# Altium PCB CSMS.PcbDoc
Units mm, origin at the board's own origin, x right, y up, seen from the top; angles counter-clockwise.
Board outline 20 x 87 mm, 2 copper layers (Top Layer, Bottom Layer); 12 components, 8 nets, 32 pads, 158 vias.
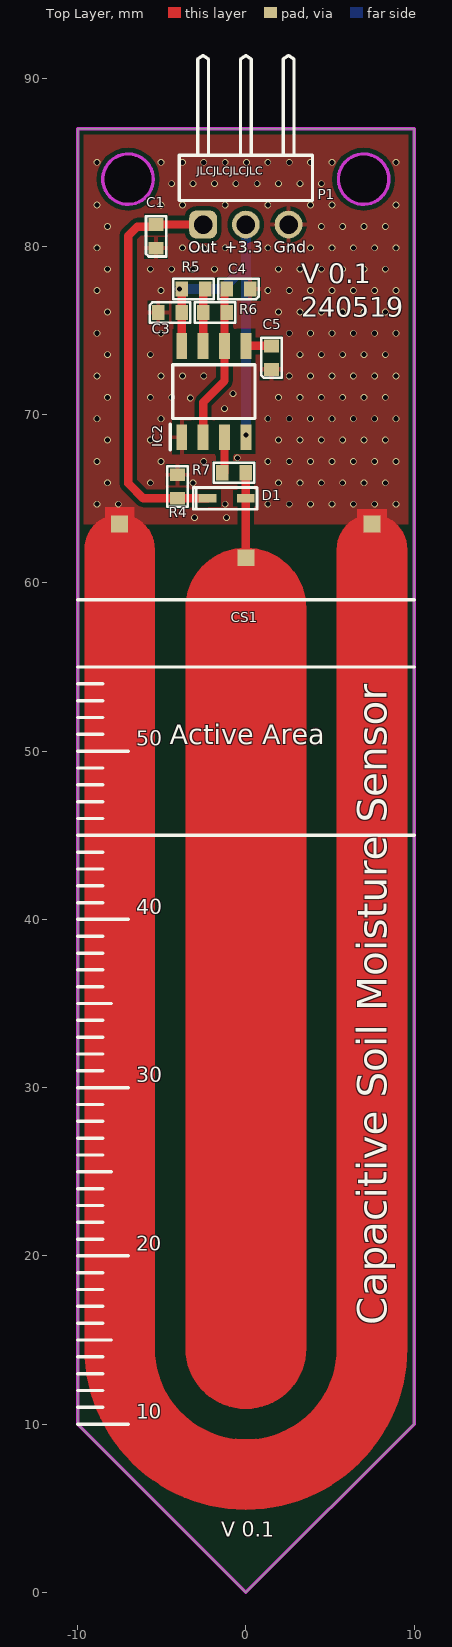
[diagram p0: Top Layer view]
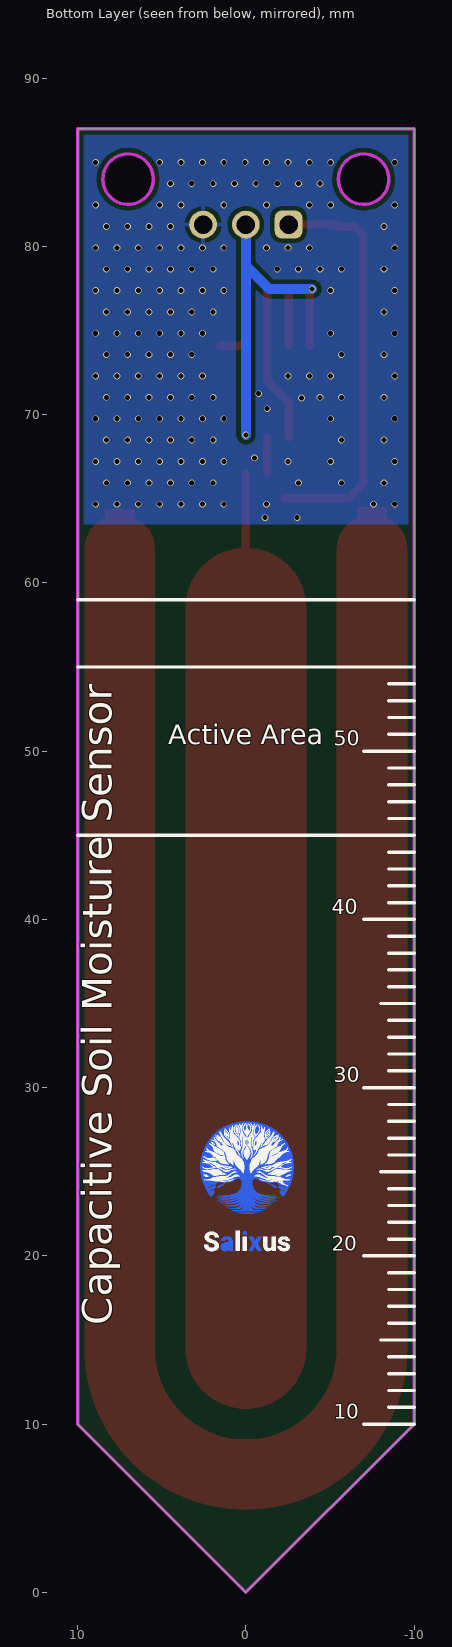
[diagram p1: Bottom Layer view, seen from below]
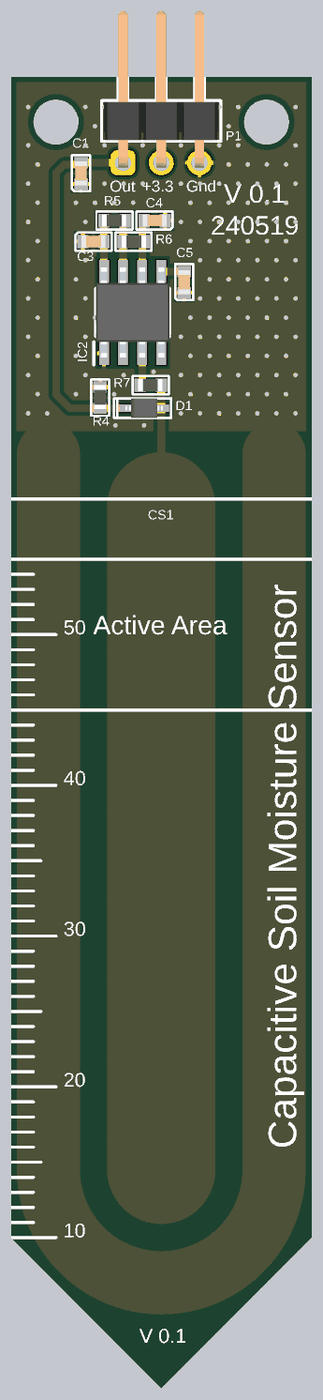
[diagram p2: 3D render of the assembled board from above, using the file's embedded part models]

## Layer stack, top to bottom
Top Solder: solder mask 0.0102, Solder Resist, Dk 3.5
Top Layer: signal copper 0.0356
Dielectric 1: dielectric 0.32, FR-4, Dk 4.8
Bottom Layer: signal copper 0.0356
Bottom Solder: solder mask 0.0102, Solder Resist, Dk 3.5

## Board outline
0,0 -10,10 -10,87 10,87 10,10
cut-out: 7,82.5 cw(c7,84) 5.5,84 cw(c7,84) 7,85.5 cw(c7,84) 8.5,84 cw(c7,84)
cut-out: -7,82.5 cw(c-7,84) -8.5,84 cw(c-7,84) -7,85.5 cw(c-7,84) -5.5,84 cw(c-7,84)

## Design rules (kind name [scope] priority, off if disabled: settings)
Clearance [All] p1: gap=0.254 ignorepadtopadclearanceinfootprint=FALSE except(0: Arc-Hole Track-Hole SMDPad-Hole THPad-Hole Via-Hole Fill-Hole Poly-Hole Region-Hole Text-Hole)
PolygonConnect [All] p1: thpad.connectstyle=Relief thpad.reliefconductorwidth=0.254 thpad.reliefentries=4 thpad.polygonreliefangle="90 Angle" thpad.airgapwidth=0.254 smdpad.connectstyle=Relief smdpad.reliefconductorwidth=0.254 smdpad.reliefentries=4 smdpad.polygonreliefangle="90 Angle" smdpad.airgapwidth=0.254 via.connectstyle=Direct via.reliefconductorwidth=0.254 via.reliefentries=4 via.polygonreliefangle="90 Angle" via.airgapwidth=0.254
RoutingVias [All] p1: holewidth=0.3 width=0.4 viastyle="Through Hole" minholewidth=0.3 minwidth=0.4 maxholewidth=0.711 maxwidth=1.27
SolderMaskExpansion [All] p1: expansion=0.102 istentingtop=FALSE
UnRoutedNet [All] p1: checkbadconnections=TRUE
Width [All] p1: maxlimit=1 minlimit=0.254 preferedwidth=0.3 minimp=50.000000 maximp=50.000000 favimp=50.000000
29 further rules are at their usual default settings.

## Components (designator, comment, footprint, x,y, rotation, side; value= is the part's Value field where it differs from the comment)
C1 "CL10B105KA8NNNC" "0603 CAP" -5.334,80.604 r90 top value="1uF 25VDC"
C3 "CL10B104KB8NNNC" "0603 CAP" -4.51,76.073 r0 top value="100nF 50VDC"
C4 "CL10B471KB8NNNC" "0603 CAP" -0.44,77.47 r180 top value="470pF 50VDC"
C5 "CC0603KRX7R9BB103" "0603 CAP" 1.524,73.386 r90 top value="10nF 50VDC"
CS1 "Sens" SENS 0,34.5 r0 top
D1 "1N4148WS-E3-08" SOD2513X110N -1.138,65.024 r0 top
IC2 "TLC555CDR" SOIC127P600X175-8N -1.905,71.374 r90 top
P1 "61300311021" 61300311021 0,84.074 r180 top
R4 "0603SAF1004T5E" "0603 RES" -4.064,65.724 r90 top value="1M %1"
R5 "0603SAF3300T5E" "0603 RES" -3.11,77.47 r180 top value="330R %1"
R6 "0603SAF1601T5E" "0603 RES" -1.84,76.073 r0 top value="1.6K %1"
R7 "0603SAF1002T5E" "0603 RES" -0.7,66.548 r180 top value="10K %1"

## Footprints (in the part's own frame and the unit in brackets; to place one, negate y for a bottom-side part, rotate by r counter-clockwise, add the part's x,y. Pads: shape width x height; smd on the part's side, far side on the other; paste and mask are expansions set on the pad)
"0603 CAP" [mm]
  rect 0.75x0.9 smd: 1(-0.7,0) 2(0.7,0)
  silkscreen extent -1.2,-0.6 1.2,0.6, body extent -0.8,-0.4 0.8,0.4, height 0.8
"0603 RES" [mm]
  rect 0.75x0.9 smd: 1(-0.7,0) 2(0.7,0)
  silkscreen extent -1.2,-0.6 1.2,0.6, body extent -0.77,-0.4 0.83,0.4, height 0.45
61300311021 [mm] "Pin Header, pitch 2.54 mm, THT, Angled, single row, 3p"
  rrect50% 1.65x1.65 hole 1.1: 1(2.54,2.77)
  round 1.65 hole 1.1: 2(0,2.77) 3(-2.54,2.77)
  silkscreen extent -3.96,-7.27 3.96,1.35, body extent -3.81,-7.27 3.81,3.09, height 2.58
SENS [mm]
  rect 1x1 smd paste-2539.97 mask+0.102: 1(0,27) 2(-7.5,29) 2(7.5,29)
  Top Layer region: -9.5,-20 -9.5,27.5 -9.302,28.368 -8.747,29.064 -7.945,29.45 -7.055,29.45 -6.253,29.064 -5.698,28.368 -5.5,27.5 -5.5,27.5 -5.5,-20 -4.955,-22.386 -3.429,-24.3 -1.224,-25.362 1.224,-25.362 3.429,-24.3 4.955,-22.386 5.5,-20 5.5,-20 5.5,27.5 5.698,28.368 6.253,29.064 7.055,29.45 7.945,29.45 8.747,29.064 9.302,28.368 9.5,27.5 9.5,27.5 9.5,-20 8.559,-24.122 5.923,-27.427 2.114,-29.262 -2.114,-29.262 -5.923,-27.427 -8.559,-24.122 -9.5,-20
  Top Layer region: -3.5,-20 -3.153,-21.519 -2.182,-22.736 -0.779,-23.412 0.779,-23.412 2.182,-22.736 3.153,-21.519 3.5,-20 3.5,-20 3.5,24 3.153,25.519 2.182,26.736 0.779,27.412 -0.779,27.412 -2.182,26.736 -3.153,25.519 -3.5,24 -3.5,24
  Top Layer lines w0.2: -9.5,-20 ccw(c0,-20) 9.5,-20 9.5,25.317 9.5,27.5 ccw(c7.5,27.5) 5.5,27.5 5.5,-20 cw(c0,-20) -5.5,-20 -5.5,27.5 ccw(c-7.5,27.5) -9.5,27.5 -9.5,-20 ; -3.5,-20 ccw(c0,-20) 3.5,-20 3.5,24 ccw(c0,24) 0,27.5 ccw(c0,24) -3.5,24 -3.5,-20
SOD2513X110N [mm]
  rect 1.05x0.5 smd: 1(-1.138,0) 2(1.138,0)
  silkscreen extent -2,-0.65 1.8,0.65, body extent -1.25,-0.65 1.25,0.65, height 1.1
SOIC127P600X175-8N [mm]
  rect 1.525x0.65 smd: 1(-2.712,1.905) 2(-2.712,0.635) 3(-2.712,-0.635) 4(-2.712,-1.905) 5(2.712,-1.905) 6(2.712,-0.635) 7(2.712,0.635) 8(2.712,1.905)
  silkscreen extent -3.47,-2.45 1.6,2.58, body extent -3,-2.45 3,2.45, height 1.75

## Part data
C1: "1uF 25VDC ±10% X7R MLCC 0603", Ozdisan Price/Stock=https://ozdisan.com/Product/Detail/522144/CL10A106MO8NQNC, Supplier 1=Ozdisan, Supplier 2=Digi-Key, Supplier Part Number 1=CL10B105KA8NNNC, Supplier Part Number 2=1276-1184-1-ND
C3: "100nF 50VDC ±10% X7R MLCC 0603", Supplier Part Number 1=1276-1000-1-ND, Ozdisan Price/Stock=https://ozdisan.com/Product/Detail/522144/CL10A106MO8NQNC, Supplier 1=Digi-Key
C4: "470pF 50VDC ±10% X7R MLCC 0603", Supplier Part Number 1=187-CL10B471KB8NNNC, Ozdisan Price/Stock=https://ozdisan.com/Product/Detail/522144/CL10A106MO8NQNC, Supplier 1=Mouser
C5: "10nF, 50 V, ± 10%, X7R, 0603, Multilayer Ceramic Capacitor,", Supplier Part Number 1=603-CC603KRX7R9BB103, Ozdisan Price/Stock=https://ozdisan.com/Product/Detail/522144/CL10A106MO8NQNC, Supplier 1=Mouser
CS1: "Pcb Sens"
D1: "Diode", Manufacturer_Name=Vishay, Mouser Part Number=78-1N4148WS-E3-08, Arrow Part Number=1N4148WS-E3-08, Arrow Price/Stock=https://www.arrow.com/en/products/1n4148ws-e3-08/vishay?region=europe, Datasheet Link=https://datasheet.datasheetarchive.com/originals/distributors/Datasheets-DGA23/1390442.pdf, Height=1.15mm, Manufacturer_Part_Number=1N4148WS-E3-08, Mouser Price/Stock=https://www.mouser.co.uk/ProductDetail/Vishay-Semiconductors/1N4148WS-E3-08?qs=bTzheeSci6R8fv1OBRENhQ%3D%3D, Supplier 1=Mouser, Supplier Part Number 1=78-1N4148WS-E3-08
IC2: "555 Astable 2.1-MHz, 250-µA, Low-Power Timer 8-SOIC 0 to 70", Manufacturer_Name="Texas Instruments", Mouser Part Number=595-TLC555CDR, Arrow Part Number=TLC555CDR, Arrow Price/Stock=https://www.arrow.com/en/products/tlc555cdr/texas-instruments?region=nac, Datasheet Link=https://www.ti.com/lit/ds/symlink/tlc555.pdf?ts=1599218356509&ref_url=https%253A%252F%252Fwww.ti.com%252Fstore%252Fti%252Fen%252Fp%252Fproduct%252F%253Fp%253DTLC555CDR%2526keyMatch%253DTLC555CDR%2526tisearch%253DSearch-EN-everything%2526usecase%253DOPN, Height=1.75mm, Manufacturer_Part_Number=TLC555CDR, Mouser Price/Stock=https://www.mouser.co.uk/ProductDetail/Texas-Instruments/TLC555CDR?qs=gb35HGp1gQImgWgRW%252BGYaw%3D%3D, Supplier 1=Mouser, Supplier Part Number 1=595-TLC555CDR
P1: "WR-PHD Pin Header, THT, Angled, pitch 2.54mm, 1 Row, 3P", Contact Resistance=20mΩ, Manufacturer="Wurth Elektronik", Operating Temperature Max=105°C, Operating Temperature Min=-40°C, Rated Current=3A, Supplier Part Number 1=732-5336-ND, Withstanding Voltage=500V, Working Voltage=250V, Category="Board-to-Board Connectors", ComponentLink1Description="Website Link", ComponentLink1URL=https://www.we-online.com/redexpert/article/61300311021?ad, ComponentLink2Description="Datasheet Link", ComponentLink2URL=https://www.we-online.com/redexpert/spec/61300311021?ad, Gender="Pin Header", Manufacturer Part Number=61300311021, Match Code=WR-PHD, Mount="Through Hole", Number of Pins=3, Number of Rows=1, Orientation=Angled, Packaging=Bag, Pitch=2.54mm, Supplier 1=Digi-Key
R4: "1M Ohms 1% 1/10W-S 100PPM RES 0603", Supplier Part Number 1=79M5904, Ozdisan Price/Stock=https://ozdisan.com/Product/Detail/522144/CL10A106MO8NQNC, Supplier 1=Newark
R5: "330R Ohms 1% 1/10W-S 100PPM RES 0603", Supplier Part Number 1=603-RC0603FR-07330RL, Ozdisan Price/Stock=https://ozdisan.com/Product/Detail/522144/CL10A106MO8NQNC, Supplier 1=Mouser
R6: "1.6K Ohms 1% 1/10W-S 100PPM RES 0603", Supplier Part Number 1=39P9958, Ozdisan Price/Stock=https://ozdisan.com/Product/Detail/522144/CL10A106MO8NQNC, Supplier 1=Avnet
R7: "10K Ohms 1% 1/10W-S 100PPM RES 0603", Supplier Part Number 1=1632392, Ozdisan Price/Stock=https://ozdisan.com/Product/Detail/522144/CL10A106MO8NQNC, Supplier 1=Farnell

## Via types
v1: diameter 0.4, hole 0.3, Top Layer to Bottom Layer, tented both sides, 158 vias

## Nets (pads, with @x,y where several pads share a name; then routed paths per layer and width w, separated by ;. In a path a pad name is that pad's centre, name@x,y a point inside that pad or via, vN(x,y) a via of type N, cw(c..) or ccw(c..) an arc to the next point about the centre after c; other vN are vias at no path point)
+3.3: C3.2 IC2.4 IC2.8 P1.2 R5.2 | length 20.4
  Top Layer w0.5: IC2.8 C3.2 R5.2
  Bottom Layer w0.6: v1(-3.94,77.47) -1.397,77.47 0,78.867 ; v1(0,68.792) 0,74.041 0,78.867 ; P1.2 0,78.867
GND: C1.1 C3.1 C4.1 C5.1 CS1.2 IC2.1 P1.3 R4.2
  other v1: -3.048,63.881 -1.143,63.881 -8.851,64.68 -7.581,64.68 -1.231,64.68 1.309,64.68 2.579,64.68 3.849,64.68 5.119,64.68 6.389,64.68 7.659,64.68 8.929,64.68 -8.216,65.95 -5.676,65.95 -3.136,65.95 1.944,65.95 3.214,65.95 4.484,65.95 5.754,65.95 7.024,65.95 8.294,65.95 -8.851,67.22 -5.041,67.22 -2.501,67.22 1.309,67.22 2.579,67.22 3.849,67.22 5.119,67.22 6.389,67.22 7.659,67.22 8.929,67.22 -0.508,67.437 -8.216,68.49 -5.676,68.49 1.944,68.49 3.214,68.49 4.484,68.49 5.754,68.49 7.024,68.49 8.294,68.49 -8.851,69.76 -5.041,69.76 1.309,69.76 2.579,69.76 3.849,69.76 5.119,69.76 6.389,69.76 7.659,69.76 8.929,69.76 -1.27,70.358 -3.302,70.993 -8.216,71.03 -5.676,71.03 -4.406,71.03 1.944,71.03 3.214,71.03 4.484,71.03 5.754,71.03 7.024,71.03 8.294,71.03 -0.762,71.247 -8.851,72.3 -5.041,72.3 -3.771,72.3 -2.501,72.3 2.579,72.3 3.849,72.3 5.119,72.3 6.389,72.3 7.659,72.3 8.929,72.3 -8.216,73.57 -5.676,73.57 3.214,73.57 4.484,73.57 5.754,73.57 7.024,73.57 8.294,73.57 -8.851,74.84 -5.041,74.84 2.579,74.84 3.849,74.84 5.119,74.84 6.389,74.84 7.659,74.84 8.929,74.84 -8.216,76.11 1.944,76.11 3.214,76.11 4.484,76.11 5.754,76.11 7.024,76.11 8.294,76.11 -8.851,77.38 -5.041,77.38 1.309,77.38 2.579,77.38 3.849,77.38 5.119,77.38 6.389,77.38 7.659,77.38 8.929,77.38 -8.216,78.65 -5.676,78.65 -4.406,78.65 -3.136,78.65 -1.866,78.65 1.944,78.65 3.214,78.65 4.484,78.65 5.754,78.65 7.024,78.65 8.294,78.65 -8.851,79.92 -3.771,79.92 -2.501,79.92 -1.231,79.92 1.309,79.92 2.579,79.92 3.849,79.92 5.119,79.92 6.389,79.92 7.659,79.92 8.929,79.92 -8.216,81.19 4.484,81.19 5.754,81.19 7.024,81.19 8.294,81.19 -8.851,82.46 -5.041,82.46 -3.771,82.46 -1.231,82.46 1.309,82.46 3.849,82.46 5.119,82.46 8.929,82.46 -4.406,83.73 -3.136,83.73 -1.866,83.73 -0.596,83.73 0.674,83.73 1.944,83.73 3.214,83.73 4.484,83.73 -8.851,85 -5.041,85 -3.771,85 -2.501,85 -1.231,85 0.039,85 1.309,85 2.579,85 3.849,85 5.119,85 8.929,85
NetC4_2: C4.2 IC2.2 IC2.6 R6.2 | length 9.2
  Top Layer w0.5: -2.543,70.736 -1.273,72.006 ; IC2.2 -2.54,70.736 ; -1.27,72.006 IC2.6 C4.2@-1.27,77.265 ; C4.2@-1.27,77.395 C4.2@-1.27,77.47
NetC5_2: C5.2 IC2.5 | length 1.5
  Top Layer w0.5: IC2.5@-0.003,74.086 C5.2
NetCS1_1: CS1.1 D1.2 R7.1 | length 5
  Top Layer w0.5: CS1.1 0,62 D1.2 R7.1
NetR5_1: IC2.7 R5.1 R6.1 | length 3.4
  Top Layer w0.5: IC2.7 R6.1 R5.1@-2.54,77.47
NetR7_2: IC2.3 R7.2 | length 2.1
  Top Layer w0.5: R7.2@-1.27,66.548 IC2.3
SensOut: C1.2 D1.1 P1.1 R4.1 | length 24.5
  Top Layer w0.5: P1.1 C1.2 -5.459,81.179 -6.451,81.179 -6.985,80.645 -6.985,65.913 -6.096,65.024 R4.1 D1.1

## Polygon pours and split planes (outlines as drawn)
GND on Top Layer "NONET_L-01_P-001" (solid, remove dead copper, pour order 1): 10,87 -10,87 -10,63.5 10,63.5
GND on Bottom Layer "NONET_L-01_P-001" (solid, pour order 0): -10,87 10,87 10,63.5 -10,63.5

## Keep-outs
Keep-Out Layer:
  circle w0.2: c-7,84 r1.5
  circle w0.2: c7,84 r1.5
  lines w0.2: -10,10 -10,87 10,87 10,10 0,0 -10,10

## Other copper
Top Layer:
  rectangle net GND: 6.604,63.754 8.382,64.389
  rectangle net GND: -8.382,63.754 -6.604,64.516
  pour cut-out: 0.82,72.934 0.82,73.81 2.228,73.81 2.228,72.934
  pour cut-out: -1.152,67.252 -0.276,67.252 -0.276,65.844 -1.152,65.844
  pour cut-out: -0.889,77.216 -0.127,77.216 -0.127,76.835 -0.889,76.835
  pour cut-out: -0.892,78.174 -0.13,78.174 -0.13,77.793 -0.892,77.793
  pour cut-out: -3.429,78.105 -2.667,78.105 -2.667,77.724 -3.429,77.724
Bottom Layer:
  region: 719 vertices and 0 holes, not listed, extent -2.842,22.644 2.705,28.01
  region: 1.477,20.431 1.449,20.387 1.412,20.35 1.366,20.32 1.312,20.297 1.272,20.29 1.208,20.289 1.152,20.293 1.111,20.301 1.074,20.318 1.035,20.345 1.006,20.365 1.001,20.363 0.998,20.355 0.986,20.32 0.979,20.301 0.864,20.301 0.767,20.303 0.754,20.307 0.754,20.313 0.769,20.355 0.777,20.408 0.782,20.5 0.785,20.661 0.791,20.899 0.796,20.944 0.805,20.972 0.833,21.026 0.87,21.07 0.919,21.106 0.977,21.133 1.028,21.145 1.092,21.151 1.16,21.152 1.221,21.146 1.269,21.134 1.318,21.115 1.363,21.09 1.401,21.062 1.428,21.033 1.452,20.996 1.47,20.956 1.481,20.917 1.485,20.888 1.261,20.888 1.256,20.909 1.247,20.931 1.231,20.954 1.215,20.968 1.194,20.979 1.171,20.987 1.146,20.99 1.122,20.99 1.098,20.987 1.076,20.979 1.057,20.967 1.038,20.947 1.024,20.924 1.016,20.896 1.011,20.86 1.007,20.813 1.121,20.809 1.216,20.803 1.277,20.794 1.35,20.768 1.409,20.731 1.433,20.71 1.453,20.686 1.47,20.66 1.483,20.632 1.495,20.584 1.497,20.529 1.491,20.475
  region: 1.696,24.058 1.689,24.054 1.675,24.052 1.632,24.055 1.582,24.066 1.537,24.082 1.513,24.098 1.489,24.121 1.467,24.15 1.449,24.181 1.437,24.208 1.437,24.221 1.452,24.225 1.486,24.223 1.53,24.217 1.565,24.204 1.599,24.181 1.636,24.145 1.688,24.085 1.697,24.068
  region: -1.583,24.165 -1.569,24.197 -1.569,24.208 -1.574,24.216 -1.583,24.221 -1.598,24.224 -1.643,24.224 -1.68,24.218 -1.711,24.203 -1.743,24.174 -1.786,24.128 -1.824,24.083 -1.84,24.058 -1.83,24.052 -1.803,24.052 -1.766,24.056 -1.724,24.065 -1.673,24.081 -1.637,24.1 -1.608,24.127
  region: 0.523,22.563 0.485,22.553 0.413,22.539 0.312,22.525 0.087,22.505 -0.02,22.503 -0.161,22.506 -0.299,22.511 -0.398,22.518 -0.561,22.541 -0.618,22.552 -0.639,22.56 -0.477,22.558 -0.361,22.558 -0.266,22.561 -0.189,22.569 -0.127,22.581 -0.082,22.588 -0.022,22.578 0.126,22.556 0.239,22.551 0.46,22.56
  region: -1.911,20.496 -1.939,20.432 -1.976,20.388 -2.024,20.349 -2.081,20.318 -2.143,20.297 -2.198,20.29 -2.267,20.288 -2.337,20.292 -2.395,20.301 -2.45,20.319 -2.498,20.344 -2.539,20.375 -2.571,20.41 -2.594,20.45 -2.609,20.494 -2.614,20.54 -2.609,20.589 -2.597,20.628 -2.578,20.663 -2.552,20.695 -2.518,20.722 -2.477,20.747 -2.428,20.769 -2.37,20.787 -2.305,20.803 -2.229,20.822 -2.179,20.844 -2.162,20.857 -2.15,20.871 -2.143,20.887 -2.141,20.904 -2.144,20.925 -2.154,20.947 -2.167,20.966 -2.182,20.978 -2.223,20.991 -2.271,20.994 -2.316,20.986 -2.334,20.979 -2.348,20.97 -2.374,20.936 -2.382,20.918 -2.385,20.902 -2.387,20.894 -2.401,20.89 -2.499,20.888 -2.613,20.888 -2.608,20.926 -2.599,20.964 -2.585,20.999 -2.563,21.032 -2.534,21.063 -2.481,21.102 -2.419,21.13 -2.347,21.147 -2.265,21.153 -2.184,21.148 -2.114,21.132 -2.053,21.104 -2.001,21.065 -1.968,21.029 -1.945,20.99 -1.932,20.947 -1.928,20.898 -1.931,20.845 -1.947,20.802 -1.962,20.777 -1.981,20.753 -2.004,20.732 -2.032,20.713 -2.104,20.678 -2.2,20.646 -2.3,20.617 -2.359,20.592 -2.376,20.58 -2.387,20.566 -2.393,20.551 -2.394,20.533 -2.392,20.512 -2.385,20.493 -2.373,20.477 -2.356,20.464 -2.336,20.454 -2.311,20.447 -2.251,20.444 -2.199,20.453 -2.157,20.473 -2.142,20.487 -2.129,20.503 -2.12,20.522 -2.115,20.542 -2.111,20.567 -2.004,20.567 -1.919,20.565 -1.901,20.562 -1.896,20.558 -1.9,20.531
  region: -1.081,20.413 -1.114,20.364 -1.159,20.327 -1.214,20.3 -1.26,20.29 -1.334,20.289 -1.412,20.295 -1.435,20.301 -1.46,20.313 -1.496,20.335 -1.523,20.356 -1.548,20.378 -1.553,20.367 -1.555,20.341 -1.558,20.305 -1.664,20.303 -1.771,20.301 -1.771,21.139 -1.547,21.139 -1.547,20.546 -1.524,20.52 -1.498,20.496 -1.467,20.479 -1.43,20.469 -1.387,20.467 -1.352,20.469 -1.326,20.476 -1.306,20.49 -1.286,20.513 -1.278,20.53 -1.273,20.571 -1.269,20.836 -1.267,21.139 -1.044,21.139 -1.044,20.83 -1.046,20.563 -1.05,20.508 -1.057,20.474
  region: -0.291,20.303 -0.41,20.305 -0.481,20.432 -0.556,20.559 -0.632,20.43 -0.705,20.301 -0.947,20.301 -0.937,20.317 -0.795,20.561 -0.73,20.68 -0.704,20.734 -0.82,20.939 -0.933,21.135 -0.815,21.139 -0.697,21.139 -0.628,21.017 -0.555,20.895 -0.486,21.014 -0.438,21.099 -0.413,21.136 -0.292,21.138 -0.179,21.136 -0.295,20.937 -0.411,20.73 -0.291,20.516 -0.172,20.305
  region: 0.173,21.3 0.155,21.278 0.129,21.26 0.095,21.246 0.054,21.245 0.008,21.255 -0.011,21.264 -0.027,21.276 -0.039,21.291 -0.049,21.309 -0.058,21.354 -0.057,21.391 -0.045,21.418 -0.025,21.442 -0.004,21.459 0.022,21.468 0.054,21.473 0.083,21.472 0.109,21.467 0.132,21.458 0.151,21.445 0.167,21.429 0.178,21.409 0.185,21.385 0.188,21.359 0.184,21.327
  region: 0.178,20.301 0.178,21.139 -0.046,21.139 -0.046,20.301
  region: 0.597,20.301 0.597,21.495 0.373,21.495 0.373,20.301
  region: 2.433,20.481 2.456,20.526 2.471,20.574 2.482,20.638 2.482,20.658 2.248,20.654 2.244,20.619 2.234,20.577 2.216,20.543 2.187,20.514 2.147,20.489 2.127,20.48 2.106,20.475 2.028,20.472 1.949,20.475 1.929,20.481 1.909,20.491 1.889,20.505 1.873,20.522 1.86,20.541 1.852,20.562 1.847,20.584 1.847,20.608 1.852,20.631 1.86,20.655 1.881,20.686 1.921,20.714 1.998,20.748 2.129,20.797 2.197,20.824 2.255,20.853 2.305,20.884 2.348,20.919 2.384,20.957 2.411,20.997 2.43,21.039 2.442,21.086 2.446,21.144 2.438,21.199 2.419,21.251 2.39,21.298 2.35,21.34 2.3,21.377 2.242,21.407 2.175,21.43 2.116,21.44 2.024,21.443 1.926,21.439 1.896,21.433 1.86,21.421 1.787,21.389 1.728,21.349 1.68,21.299 1.644,21.241 1.629,21.201 1.62,21.164 1.612,21.113 1.609,21.097 1.846,21.097 1.846,21.118 1.849,21.141 1.857,21.165 1.869,21.189 1.883,21.208 1.912,21.231 1.948,21.247 1.993,21.256 2.047,21.259 2.081,21.256 2.112,21.25 2.14,21.239 2.163,21.226 2.183,21.209 2.197,21.189 2.207,21.167 2.211,21.142 2.209,21.114 2.202,21.089 2.188,21.067 2.166,21.046 2.135,21.026 2.094,21.006 1.977,20.962 1.854,20.914 1.803,20.889 1.76,20.863 1.723,20.835 1.693,20.805 1.667,20.773 1.647,20.739 1.632,20.702 1.621,20.666 1.614,20.63 1.612,20.595 1.614,20.56 1.62,20.526 1.631,20.494 1.645,20.463 1.663,20.434 1.684,20.407 1.709,20.382 1.737,20.359 1.769,20.339 1.804,20.322 1.841,20.308 1.882,20.298 1.948,20.289 2.027,20.288 2.106,20.292 2.171,20.302 2.228,20.319 2.28,20.342 2.327,20.37 2.369,20.402 2.404,20.439

## Silkscreen, mask and mechanical layers (free items; w line width, h text height)
Top Overlay:
  lines w0.2: -10,10 -7,10 ; -10,11 -8.5,11 ; -10,12 -8.5,12 ; -10,13 -8.5,13 ; -10,14 -8.5,14 ; -10,15 -8,15 ; -10,16 -8.5,16 ; -10,17 -8.5,17 ; -10,18 -8.5,18 ; -10,19 -8.5,19 ; -10,20 -7,20 ; -10,21 -8.5,21 ; -10,22 -8.5,22 ; -10,23 -8.5,23 ; -10,24 -8.5,24 ; -10,25 -8,25 ; -10,26 -8.5,26 ; -10,27 -8.5,27 ; -10,28 -8.5,28 ; -10,29 -8.5,29 ; -10,30 -7,30 ; -10,31 -8.5,31 ; -10,32 -8.5,32 ; -10,33 -8.5,33 ; -10,34 -8.5,34 ; -10,35 -8,35 ; -10,36 -8.5,36 ; -10,37 -8.5,37 ; -10,38 -8.5,38 ; -10,39 -8.5,39 ; -10,40 -7,40 ; -10,41 -8.5,41 ; -10,42 -8.5,42 ; -10,43 -8.5,43 ; -10,44 -8.5,44 ; -10,45 10,45 ; -10,46 -8.5,46 ; -10,47 -8.5,47 ; -10,48 -8.5,48 ; -10,49 -8.5,49 ; -10,50 -7,50 ; -10,51 -8.5,51 ; -10,52 -8.5,52 ; -10,53 -8.5,53 ; -10,54 -8.5,54 ; -10,55 10,55 ; -10,59 10,59
  text "JLCJLCJLCJLC" at -2.922,84.082 h0.8
  text "Out" at -3.429,79.388 h1.2
  text "+3.3" at -1.27,79.389 h1.2
  text "Gnd" at 1.651,79.388 h1.2
  text "V 0.1 / 240519" at 3.307,75.438 h2
  text "50" at -6.5,50.016 h1.52
  text "Active Area" at -4.533,50.02 h2
  text "40" at -6.5,40.016 h1.52
  text "30" at -6.5,30.018 h1.52
  text "20" at -6.501,20.009 h1.5
  text "Capacitive Soil Moisture Sensor" at 8.967,15.889 h3 r90
  text "10" at -6.5,10.016 h1.5
  text "V 0.1" at -1.46,3.016 h1.52
Bottom Overlay:
  drawing of 74 lines, arcs and shapes, not listed
  text "50" at -5.23,50.016 h1.52
  text "Active Area" at 4.613,50.02 h2
  text "40" at -5.103,40.016 h1.52
  text "30" at -5.23,30.018 h1.52
  text "20" at -5.102,20.009 h1.5
  text "Capacitive Soil Moisture Sensor" at 7.391,15.875 h3 r270
  text "10" at -5.23,10.016 h1.5
Bottom Solder:
  drawing of 87 lines, arcs and shapes, not listed
Mechanical 1:
  region: 16.692,87.046 16.184,90.348 17.2,90.348
  region: 17.2,80.744 16.184,80.744 16.692,84.046
  region: -10,92.688 -13.302,92.18 -13.302,93.196
  region: -3.698,92.18 -7,92.688 -3.698,93.196
  region: 10.302,90.176 7,90.684 10.302,91.192
  region: -7,90.684 -10.302,90.176 -10.302,91.192
  region: -22.132,10 -22.64,13.302 -21.624,13.302
  region: -21.624,83.5 -22.64,83.5 -22.132,86.802
  region: -21.595,-3.302 -22.611,-3.302 -22.103,0
  region: -22.103,10 -22.611,13.302 -21.595,13.302
  region: -10,99.031 -13.302,98.523 -13.302,99.539
  region: 13.302,98.523 10,99.031 13.302,99.539
  region: -7.307,85.462 -10.126,87.255 -9.457,88.02
  region: -34.881,0 -35.389,3.302 -34.373,3.302
  region: -34.373,83.5 -35.389,83.5 -34.881,86.802
  region: 24.893,60.5 23.877,60.5 24.385,63.802
  region: 24.385,0 23.877,3.302 24.893,3.302
  lines w0.2: -38.056,0 -1.27,0 -25.278,0 ; -37.04,87 -10.254,87 ; -34.881,0 -34.881,39.63 ; -34.881,44.671 -34.881,87 ; -25.307,10 -11.27,10 -25.278,10 ; -22.132,10 -22.132,27.897 ; -22.132,32.937 -22.132,87 ; -22.103,-6.35 -22.103,0 ; -22.103,10 -22.103,16.35 ; -16.35,92.688 -10,92.688 ; -16.35,99.031 -10,99.031 ; -16.257,91.617 -11.559,87.505 -9.806,87.621 ; -13.35,90.684 -7,90.684 ; -10,95.863 -10,88.316 -10,102.206 ; -7,92.688 -0.65,92.688 ; -7,93.859 -7,85.316 -7,95.863 ; 1.27,0 27.56,0 ; 7,85.316 7,93.859 ; 7,90.684 13.35,90.684 ; 8.27,84.046 19.867,84.046 ; 10,88.316 10,102.206 ; 10,99.031 16.35,99.031 ; 11.27,64 27.56,64 ; 11.27,87.046 19.867,87.046 ; 16.692,77.696 16.692,84.046 ; 16.692,87.046 16.692,93.396 ; 24.385,0 24.385,29.333 ; 24.385,34.373 24.385,64
  text "20,00" at -3.051,100.351 h3.17
  text "3,00" at -10.16,96.033 h3.17
  text "14,00" at -0.508,91.715 h3.17
  text "3,00" at -21.082,89.048 h3.17
  text "3,00" at 13.843,84.857 h3.17
  text "87" at -36.322,41.436 h3.17
  text "64" at 22.479,31.022 h3.17
  text "77" at -23.495,29.591 h3.17
  text "10,00" at -27.582,4.025 h3.17